# Altium PCB TopSheet.PcbDoc
Units mil, origin at the board's own origin, x right, y up, seen from the top; angles counter-clockwise.
Board outline 2204.72 x 2578.74 mil, 2 copper layers (Top Layer, Bottom Layer), stack 61.7 mil thick; 25 components, 29 nets, 166 pads, 12 vias.
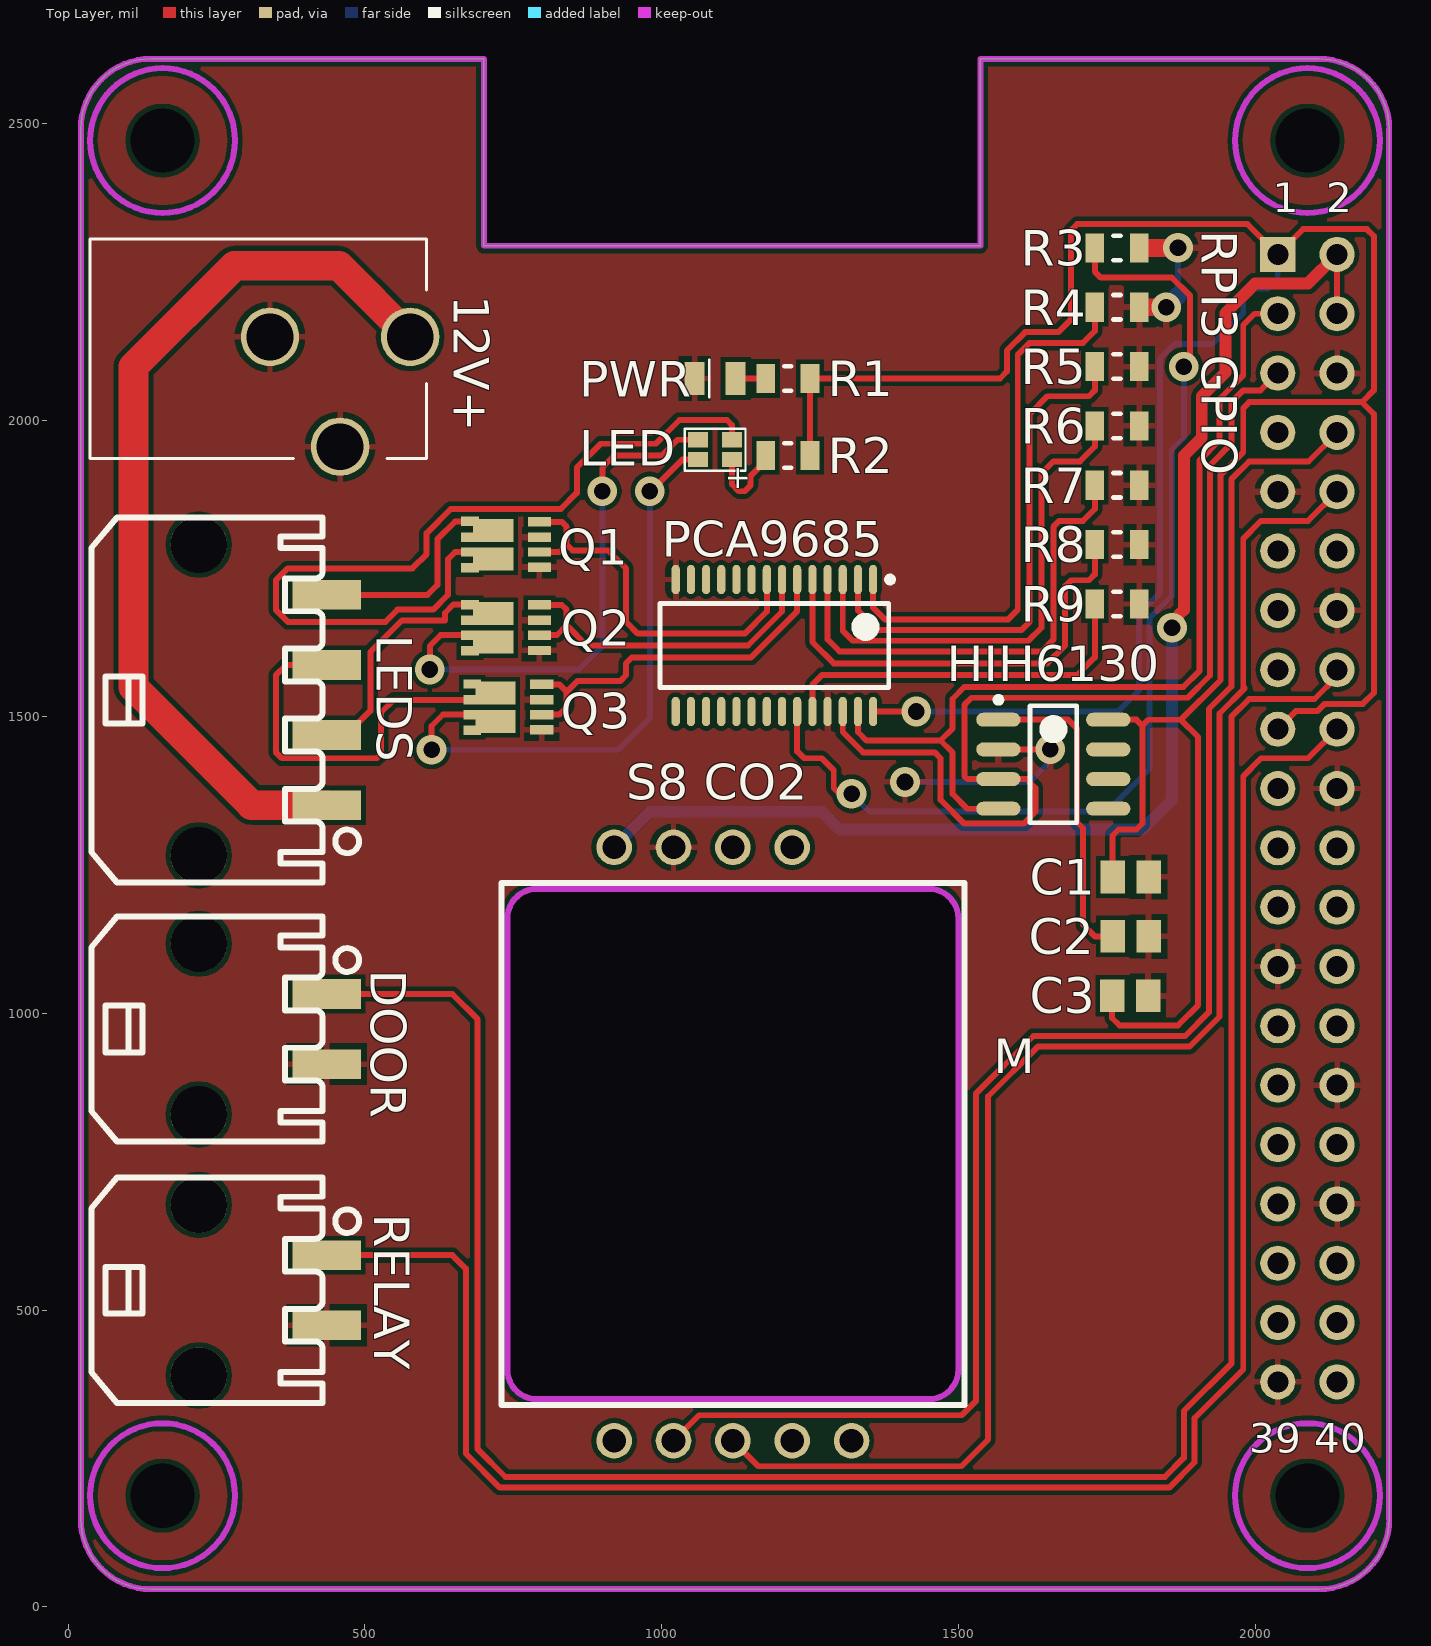
[diagram p0: Top Layer view]
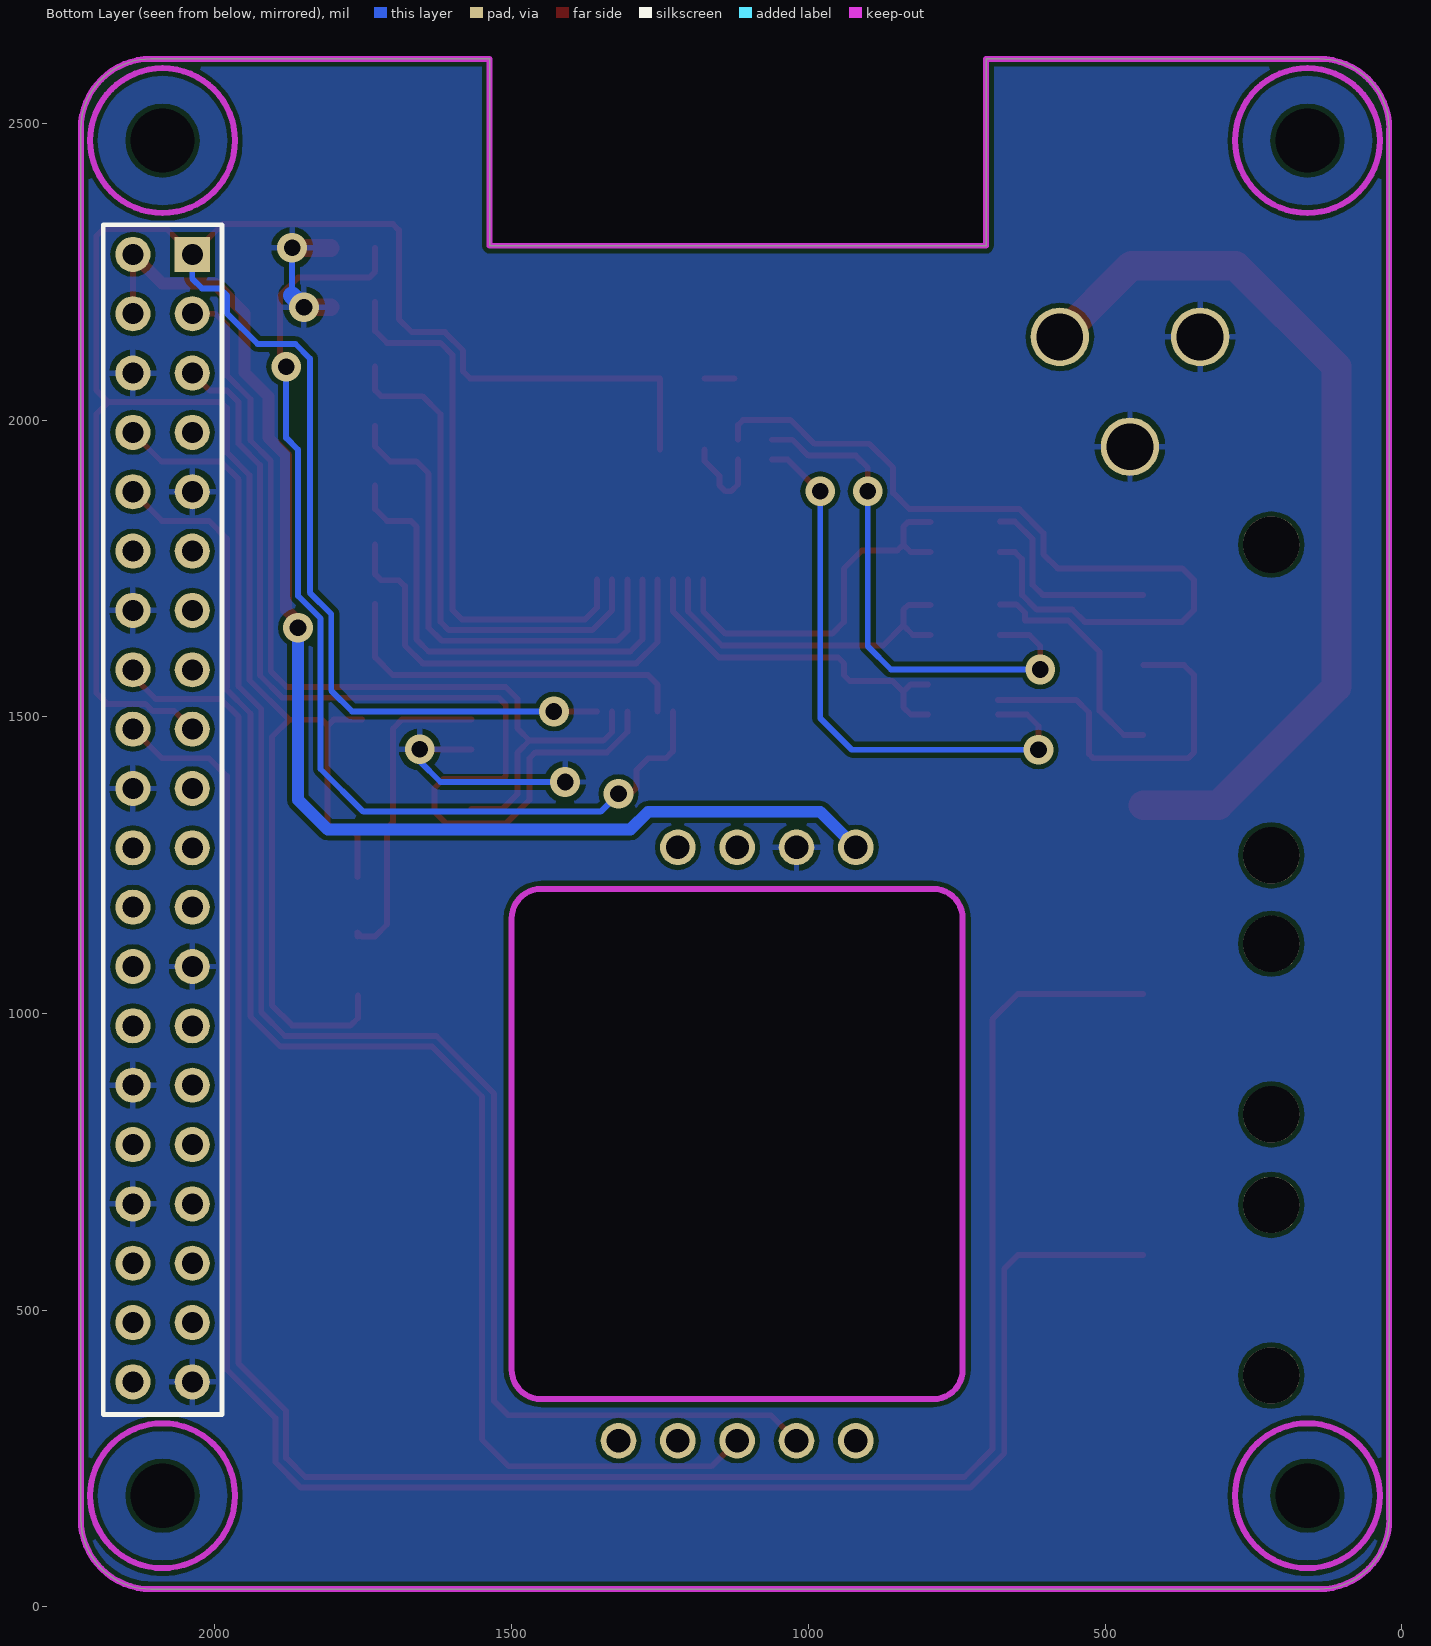
[diagram p1: Bottom Layer view, seen from below]

## Layer stack, top to bottom
Top Solder: solder mask 0.4, Solder Resist, Dk 3.5
Top Layer: signal copper 1.4
Dielectric 1: dielectric 58.9, FR-4, Dk 4.8
Bottom Layer: signal copper 1.4
Bottom Solder: solder mask 0.4, Solder Resist, Dk 3.5

## Board outline
21.26,147.99 21.26,2490.51 cw(c139.37,2490.51) 139.37,2608.62 700.39,2608.62 700.39,2293.66 1537.01,2293.66 1537.01,2608.62 2107.87,2608.62 cw(c2107.87,2490.51) 2225.98,2490.51 2225.98,147.99 cw(c2107.87,147.99) 2107.87,29.88 139.37,29.88 cw(c139.37,147.99)
cut-out: 740,400 740,1160 cw(c790,1160) 790,1210 1450,1210 cw(c1450,1160) 1500,1160 1500,400 cw(c1450,400) 1450,350 790,350 cw(c790,400)

## Design rules (kind name [scope] priority, off if disabled: settings)
AcuteAngle [All] p1: minimum=6.00000000000000E+0001 checktracksonly=FALSE
Clearance [All] p1: gap=8
DiffPairsRouting [All] p1: maxlimit=10 minlimit=5 mostfreqgap=10 toplayer_minwidth=5 toplayer_maxwidth=15 toplayer_prefwidth=10 bottomlayer_minwidth=5 bottomlayer_maxwidth=15 bottomlayer_prefwidth=10 maxuncoupledlength=500
HoleSize [All] p1: absolutevalues=TRUE maxlimit=247 minlimit=10 maxpercent=80.000 minpercent=20.000
MinimumAnnularRing [All] p1: minimumring=7
MinimumSolderMaskSliver [All] p1: minsoldermaskwidth=0
PolygonConnect [All] p1: connectstyle=Relief reliefconductorwidth=10 reliefentries=4 polygonreliefangle="90 Angle" airgapwidth=10
RoutingVias [All] p1: holewidth=15 width=31 viastyle="Through Hole" minholewidth=15 minwidth=28 maxholewidth=1000 maxwidth=1000
SMDEntry [All] p1: side=TRUE corner=TRUE anyangle=FALSE
SMDToCorner [All] p1: distance=100000
SolderMaskExpansion [All] p1: expansion=4
Width [All] p1: maxlimit=1000 minlimit=5 preferedwidth=10 minimp=50.000000 maximp=50.000000 favimp=50.000000
27 further rules are at their usual default settings.

## Components (designator, comment, footprint, x,y, rotation, side; value= is the part's Value field where it differs from the comment)
12V+ "CONN_BARREL_21X55_PJ-102A" CUI_21x55_BARREL 458.11,2140 r90 top
C1 "__template_cap" C0805 1790.51,1230 r0 top
C2 "__template_cap" C0805 1790.51,1130 r0 top
C3 "__template_cap" C0805 1789.49,1030 r0 top
DOOR "Molex - Micro-Fit 3.0 Series connector,  3.00mm (0.118\") pitch header, 2 positions." 43650-0209 220,973.7 r270 top
HIH6130 "HIH6130" 8SOIC150 1660,1420 r0 top
LED "LED_LTST-C19HE1WT" LED_LITEON_LTST-C19HE1WT 1090,1950 r90 top
LEDS "Molex - Micro-Fit 3.0 Series connector,  3.00mm (0.118\") pitch header, 4 positions." 43650-0409 220,1528.19 r270 top
PCA9685 "PWM_PCA9685" 28TSSOP65 1190,1620 r270 top
PWR "LED_LY971" 0805_Diode 1100,2070 r0 top
Q1 "NFET_SI7232DN" POWERPAK_1212-8_DUAL 750,1790 r180 top
Q2 "NFET_SI7232DN" POWERPAK_1212-8_DUAL 750,1650 r180 top
Q3 "NFET_SI7232DN" POWERPAK_1212-8_DUAL 753.96,1516.08 r180 top
R1 "__template_resistor" R0805 1212.6,2070 r180 top
R2 "__template_resistor" R0805 1212.6,1940 r180 top
R3 "__template_resistor" R0805 1767.4,2290 r0 top
R4 "__template_resistor" R0805 1767.4,2190 r0 top
R5 "__template_resistor" R0805 1767.4,2090 r0 top
R6 "__template_resistor" R0805 1767.4,1990 r0 top
R7 "__template_resistor" R0805 1767.4,1890 r0 top
R8 "__template_resistor" R0805 1767.4,1790 r0 top
R9 "__template_resistor" R0805 1767.4,1690 r0 top
RELAY "Molex - Micro-Fit 3.0 Series connector,  3.00mm (0.118\") pitch header, 2 positions." 43650-0209 220,533.7 r270 top
"RPI3 GPIO" "RPI GPIO Connector" RPI 2088.19,1329.09 r90 top
"S8 CO2" "S8_CO2_SENSOR" "S8 CO2 SENSOR" 920,1280 r0 top

## Footprints (in the part's own frame and the unit in brackets; to place one, negate y for a bottom-side part, rotate by r counter-clockwise, add the part's x,y. Pads: shape width x height; smd on the part's side, far side on the other; paste and mask are expansions set on the pad)
8SOIC150 [mm] "SOIC, 8-Leads, Body 5.0x4.0mm (max), Pitch 1.27mm, IPC High Density"
  oval 1.9x0.6 smd: 1(-2.35,1.905) 2(-2.35,0.635) 3(-2.35,-0.635) 4(-2.35,-1.905) 5(2.35,-1.905) 6(2.35,-0.635) 7(2.35,0.635) 8(2.35,1.905)
  silkscreen extent -2.47,-2.5 1,2.88, body extent -3.01,-2.5 3.01,2.5, height 1.75
28TSSOP65 [mm] "TSOP, 28-Leads, Body 9.8x4.5mm (max), Pitch 0.65mm, IPC High Density"
  oval 1.25x0.35 smd: 1(-2.825,4.225) 2(-2.825,3.575) 3(-2.825,2.925) 4(-2.825,2.275) 5(-2.825,1.625) 6(-2.825,0.975) 7(-2.825,0.325) 8(-2.825,-0.325) 9(-2.825,-0.975) 10(-2.825,-1.625) 11(-2.825,-2.275) 12(-2.825,-2.925) 13(-2.825,-3.575) 14(-2.825,-4.225) 15(2.825,-4.225) 16(2.825,-3.575) 17(2.825,-2.925) 18(2.825,-2.275) 19(2.825,-1.625) 20(2.825,-0.975) 21(2.825,-0.325) 22(2.825,0.325) 23(2.825,0.975) 24(2.825,1.625) 25(2.825,2.275) 26(2.825,2.925) 27(2.825,3.575) 28(2.825,4.225)
  silkscreen extent -2.95,-4.9 1.8,5.08, body extent -2.25,-4.9 2.25,4.9, height 1.2
0805_Diode [mm]
  rect 0.85x1.4 smd: 1(-1.129,0) 2(0.621,0)
  silkscreen extent -0.5,-0.8 -0.5,0.8, body extent -1.25,-0.62 0.75,0.63, height 0.59
43650-0209 [mm]
  round 2.41 hole 2.41: 1(-3.65,0) 1(3.65,0)
  rect 1.27x2.92 smd: P$1(1.5,5.48) P$2(-1.5,5.48)
  silkscreen extent -4.82,-4.6 4.82,5.3
43650-0409 [mm]
  round 2.41 hole 2.41: 1(-6.65,0) 1(6.65,0)
  rect 1.27x2.92 smd: P$1(4.5,5.48) P$2(1.5,5.48) P$3(-1.5,5.48) P$4(-4.5,5.48)
  silkscreen extent -7.82,-4.6 7.82,5.3
C0805 [mm] "Chip Capacitor, 2-Leads, Body 2.0x1.3mm, IPC High Density"
  rect 1.05x1.4 smd: 1(-0.775,0) 2(0.775,0)
  body extent -1,-0.62 1,0.63, height 0.6
CUI_21x55_BARREL [mm]
  round 2.5 hole 2: 1(0,-3) 2(0,3) 3(-4.7,0)
  silkscreen extent -5.2,-3.7 4.2,10.7, body extent -5.2,-3.7 4.2,10.7, height 11.5
LED_LITEON_LTST-C19HE1WT [mm] "LED RGB DIFFUSED 0606 SMD"
  rect 0.65x0.85 smd paste-0.05 mask+0.05: 1(-0.425,0.725) 2(0.425,0.725) 3(0.425,-0.725) 4(-0.425,-0.725)
  silkscreen extent -0.9,-1.3 0.9,1.3, body extent -0.8,-0.8 0.8,0.8, height 0.35
POWERPAK_1212-8_DUAL [mm] "PowerPAK 1212-8 Dual (Vishay footprint)"
  rect 0.99x0.405 smd: 1(-1.12,0.975) 2(-1.12,0.315) 3(-1.12,-0.315) 4(-1.12,-0.975)
  rect 1.725x0.99 smd: 5(0.863,-0.607) 7(0.863,0.607)
  rect 0.76x0.405 smd: 5(1.855,-0.992) 5(1.855,-0.315) 7(1.855,0.315) 7(1.855,0.992)
  body extent -1.5,-1.25 2,1.25, height 1.05
R0805 [mm] "Chip Resistor, 2-Leads, Body 2.0x1.3mm, IPC High Density"
  rect 0.8x1.25 smd: 1(-0.95,0) 2(0.95,0)
  silkscreen extent -0.15,-0.53 0.15,0.53, body extent -1,-0.62 1,0.63, height 0.6
RPI [mm]
  rect 1.5x1.5 hole 0.9: 1(24.13,1.27)
  round 1.5 hole 0.9: 2(24.13,-1.27) 3(21.59,1.27) 4(21.59,-1.27) 5(19.05,1.27) 6(19.05,-1.27) 7(16.51,1.27) 8(16.51,-1.27) 9(13.97,1.27) 10(13.97,-1.27) 11(11.43,1.27) 12(11.43,-1.27) 13(8.89,1.27) 14(8.89,-1.27) 15(6.35,1.27) 16(6.35,-1.27) 17(3.81,1.27) 18(3.81,-1.27) 19(1.27,1.27) 20(1.27,-1.27) 21(-1.27,1.27) 22(-1.27,-1.27) 23(-3.81,1.27) 24(-3.81,-1.27) 25(-6.35,1.27) 26(-6.35,-1.27) 27(-8.89,1.27) 28(-8.89,-1.27) 29(-11.43,1.27) 30(-11.43,-1.27) 31(-13.97,1.27) 32(-13.97,-1.27) 33(-16.51,1.27) 34(-16.51,-1.27) 35(-19.05,1.27) 36(-19.05,-1.27) 37(-21.59,1.27) 38(-21.59,-1.27) 39(-24.13,1.27) 40(-24.13,-1.27)
  body extent -25.52,-2.63 25.53,2.38, height 8.5
"S8 CO2 SENSOR" [mil]
  round 60 hole 40: 1(0,0) 2(100,0) 3(200,0) 4(300,0) 5(0,-1000) 6(100,-1000) 7(200,-1000) 8(300,-1000) 9(400,-1000)
  silkscreen extent -190,-940 590,-60, body extent -190,-940 590,-60, height 236

## Part data
12V+: "CONN JACK POWER 2.1MM PCB"
C1: library part "CAP CER 0.22UF 16V 10% X7R 0805"
C2: library part "CAP CER 0.1UF 50V 20% X7R 0805"
C3: library part "CAP CER 10UF 6.3V 10% X5R 0805"
DOOR RELAY: library part HEADER_POS2_?43650-0209
HIH6130: "Humidity Temperature Sensor 0 ~ 100% RH I²C ±4% RH 6s Surface Mount"
LED: "LED RGB DIFFUSED 0606"
LEDS: library part HEADER_POS4_?43650-0409
PWR: "LED 0805 GREEN 20MA"
Q1 Q2 Q3: "MOSFET 2N-CH 20V 25A PPAK 1212-8"
R1 R2: library part "RES 220 OHM 1/8W 1% 0805 SMD"
R3 R4 R5 R6 R7 R8 R9: library part "RES 10.0K OHM 1/8W 1% 0805 SMD"
"RPI3 GPIO": library part "rpi connector", "GPIO Header for Raspberry Pi A+/B+/Pi 2/Pi 3 - 2x20"

## Free pads (board coordinates)
  round 0 hole 108.27 unplated: ""(159.06,187.36) ""(159.06,2470.83) ""(2088.19,187.36) ""(2088.19,2470.83)

## Via types
v1: diameter 50, hole 28, Top Layer to Bottom Layer, 12 vias

## Nets (pads, with @x,y where several pads share a name; then routed paths per layer and width w, separated by ;. In a path a pad name is that pad's centre, name@x,y a point inside that pad or via, vN(x,y) a via of type N, cw(c..) or ccw(c..) an arc to the next point about the centre after c; other vN are vias at no path point)
+3V3: "RPI3 GPIO.1" "RPI3 GPIO.17" C1.1 C3.1 HIH6130.8 PCA9685.28 R1.1 R2.1 | length 5566.9
  Top Layer w10: R2.1@1250,1950 R1.1 1570,2070 1582,2082 1582,2117.46 1612.54,2148 1668,2148 1690,2170 1690,2320 1700,2330 1987.28,2330 2038.19,2279.09 2080.72,2321.62 2188.38,2321.62 2200,2310 2200,2050 2180,2030 ; PCA9685.28 v1(1428.78,1508.78) ; HIH6130.8 1799.92,1495 ; C3.1 1758.98,992.44 1771.42,980 1870,980 1904,1014 1904,1465.76 1874.88,1494.88 ; C1.1 1760,1300 1770,1310 1800,1310 1810,1320 1810,1484.88 ; 1799.92,1494.96 1810,1484.88 ; 2038.19,1479.09 2069.09,1510 2105.46,1510 2117.08,1521.62 2181.62,1521.62 2200,1540 2200,2010 2180,2030 ; 1810,1484.88 1820,1494.88 1874.88,1494.88 ; 1874.88,1494.88 1942,1562 1942,1907.46 1980,1945.46 1980,2020 1990,2030 2180,2030
  Bottom Layer w10: v1(1428.78,1508.78) 1768.78,1508.78 1804,1544 1804,1673.2 1840,1709.2 1840,2103.74 1864.26,2128 1928,2128 1980,2180 1980,2210 1991.62,2221.62 2021.62,2221.62 2038.19,2238.19 2038.19,2279.09 2038.19,2301.81
+5V: "RPI3 GPIO.2" "RPI3 GPIO.4" "S8 CO2.1" | length 2184.5
  Top Layer w10: v1(1860,1650) v1@1860,1660 ; 2138.19,2179.09 2138.19,2279.09
  Top Layer w20: v1@1860,1660 1880,1680 1880,1940 1910,1970 1910,2040 1950,2080 1950,2180 2000,2230 2089.09,2230 2138.19,2279.09
  Bottom Layer w20: 920,1280 980,1340 1270,1340 1300,1310 1810,1310 1860,1360 v1(1860,1650)
+12V: 12V+.1 LEDS.P$1 | length 1534.5
  Top Layer w50: LEDS.P$1 308.98,1351.02 110,1550 110,2090 280,2260 456.22,2260 12V+.1
BLUE_LED: LEDS.P$4 Q1.5 | length 337.6
  Top Layer w10: LEDS.P$4 605.36,1705.36 622,1722 622,1799.05 652.01,1829.06 Q1.5@676.97,1829.06
BLUE_PWM: PCA9685.8 Q1.2 Q1.4 | length 651.9
  Top Layer w10: Q1.2 827.6,1777.6 840,1790 ; Q1.4 831.61,1828.39 840,1820 840,1790 ; PCA9685.8 1177.2,1677.2 1140,1640 960,1640 940,1660 940,1750 910,1780 850,1780 840,1790
GND: 12V+.2 12V+.3 "RPI3 GPIO.6" "RPI3 GPIO.9" "RPI3 GPIO.14" "RPI3 GPIO.20" "RPI3 GPIO.25" "RPI3 GPIO.30" "RPI3 GPIO.34" "RPI3 GPIO.39" "S8 CO2.2" C1.2 C2.2 C3.2 DOOR.P$1 HIH6130.2 PCA9685.14 PCA9685.25 PWR.1 Q1.1 Q1.3 Q2.1 Q2.3 Q3.1 Q3.3 R3.2 R4.2 R5.2 R6.2 R7.2 R8.2 R9.2 RELAY.P$1 | length 585.7
  Top Layer w10: HIH6130.2 v1(1655,1445)
  Top Layer w30: R4.2 v1(1850,2190) ; R3.2 v1(1870,2290)
  Bottom Layer w10: v1(1410,1390) 1620,1390 1655,1425 v1(1655,1445) ; 1870,2210 v1(1870,2290)
  Bottom Layer w30: v1(1850,2190) 1870,2210
GPIO23: "RPI3 GPIO.16" DOOR.P$2 | length 3718.1
  Top Layer w10: DOOR.P$2 647.24,1032.76 690,990 690,265.9 736.9,219 1847.8,219 1880,251.2 1880,330 1960,410 1960,1500 1990,1530 2100,1530 2138.19,1568.19 2138.19,1579.09
GPIO24: "RPI3 GPIO.18" RELAY.P$2 | length 3205.9
  Top Layer w10: RELAY.P$2 647.24,592.76 670,570 670,258.4 727.4,201 1855.26,201 1898,243.74 1898,318 1980,400 1980,1400 2010,1430 2089.09,1430 2138.19,1479.09
GREEN_LED: LEDS.P$2 Q2.5 | length 397.6
  Top Layer w10: LEDS.P$2 468.23,1469.13 509.13,1510.03 509.13,1609.13 562.4,1662.4 634.8,1662.4 634.8,1674.8 649.06,1689.06 Q2.5@676.97,1689.06
GREEN_PWM: PCA9685.7 Q2.2 Q2.4 | length 582.6
  Top Layer w10: Q2.2 823.58,1637.6 840,1654.02 ; Q2.4 831.61,1688.39 840,1680 840,1654.02 ; PCA9685.7 1202.8,1677.34 1145.46,1620 874.02,1620 840,1654.02
NetC2_1: C2.1 HIH6130.1 | length 540.9
  Top Layer w10: HIH6130.1 1685,1495 1700,1480 1700,1322.12 1710,1312.12 1710,1150 1730,1130 1753.11,1130 1760,1136.89 C2.1
NetLED_1: LED.1 Q3.7 | length 992.4
  Top Layer w10: v1(612.3,1444.4) 612.3,1484.4 631.58,1503.68 Q3.7@680.93,1503.68 ; v1(980,1880) 981.46,1880 1034.72,1933.27 LED.1
  Bottom Layer w10: v1(612.3,1444.4) 927.1,1444.4 980,1497.3 v1(980,1880)
NetLED_2: LED.2 Q2.7 | length 904.2
  Top Layer w10: v1(609.3,1579.5) 609.3,1619.3 627.6,1637.6 Q2.7@676.97,1637.6 ; v1(900,1880) 900,1920 920,1940 1000,1940 1026.73,1966.73 LED.2
  Bottom Layer w10: v1(609.3,1579.5) 860.9,1579.5 900,1618.6 v1(900,1880)
NetLED_3: LED.3 Q1.7 | length 1423.7
  Top Layer w10: Q1.7@676.97,1777.6 652.01,1777.6 640,1765.59 640,1705.46 614.95,1680.4 554.95,1680.4 534.54,1660 370,1660 350,1680 350,1730 370,1750 580,1750 604,1774 604,1809.46 644.57,1850.03 830.03,1850.03 857.2,1877.2 857.2,1920 897.2,1960 990,1960 1030,2000 1110,2000 1118.54,1991.46 LED.3
NetLED_4: LED.4 R2.2 | length 152.6
  Top Layer w10: LED.4 1118.54,1891.46 1130,1880 1140,1880 1150,1890 1150,1905.94 1175.2,1931.14 R2.2 R2.2@1175.2,1950
NetPCA9685_1: PCA9685.1 R4.1 | length 931.4
  Top Layer w10: PCA9685.1 1356.34,1683.66 1376,1664 1584,1664 1600,1680 1600,2110 1620,2130 1710,2130 1730,2150 R4.1 R4.1@1730,2198.86
NetPCA9685_2: PCA9685.2 R5.1 | length 877.4
  Top Layer w10: PCA9685.2 1330.75,1679.25 1364,1646 1606,1646 1620,1660 1620,2010 1650,2040 1720,2040 1730,2050 R5.1
NetPCA9685_3: PCA9685.3 R6.1 | length 840.7
  Top Layer w10: PCA9685.3 1305.16,1644.84 1322,1628 1618,1628 1640,1650 1640,1910 1660,1930 1704.61,1930 1730,1955.39 R6.1
NetPCA9685_4: PCA9685.4 R7.1 | length 810.4
  Top Layer w10: PCA9685.4 1279.57,1630.43 1300,1610 1640,1610 1660,1630 1660,1820 1670,1830 1710,1830 1730,1850 R7.1
NetPCA9685_5: PCA9685.5 R8.1 | length 766.9
  Top Layer w10: PCA9685.5 1253.98,1626.02 1290,1590 1650,1590 1680,1620 1680,1720 1690,1730 1720,1730 1730,1740 R8.1
NetPCA9685_23: PCA9685.23 R3.1 | length 1793
  Top Layer w10: PCA9685.23 1228.39,1441.61 1240,1430 1270,1430 1290,1410 1290,1380 1300,1370 v1(1320,1370) ; R3.1 1730,2250 1740,2240 1860,2240 1890,2210 1890,2100 v1(1880,2090)
  Bottom Layer w10: v1(1320,1370) 1350,1340 1750,1340 1822,1412 1822,1665.74 1860,1703.74 1860,1950 1880,1970 v1(1880,2090)
NetPCA9685_24: PCA9685.24 R9.1 | length 630.3
  Top Layer w10: PCA9685.24 1253.98,1553.98 1270,1570 1700,1570 1730,1600 R9.1
NetPWR_2: PWR.2 R1.2 | length 50.7
  Top Layer w10: PWR.2 R1.2
RED_LED: LEDS.P$3 Q3.5 | length 639.8
  Top Layer w10: LEDS.P$3 367.25,1587.25 350,1570 350,1440 360,1430 520,1430 527.13,1437.13 527.13,1507.13 548.48,1528.48 Q3.5@680.93,1528.48
RED_PWM: PCA9685.6 Q3.2 Q3.4 | length 630
  Top Layer w10: Q3.2 827.54,1503.68 840,1516.14 840,1542.01 ; Q3.4 827.54,1554.47 840,1542.01 ; PCA9685.6 1228.39,1677.47 1150.91,1600 950,1600 940,1590 940,1570 930,1560 857.99,1560 840,1542.01
RX: "RPI3 GPIO.10" "S8 CO2.7" | length 2505.4
  Top Layer w10: 1120,280 1163,237 1505.2,237 1550,281.8 1550,860 1634,944 1889.46,944 1940,994.54 1940,1505.46 1982.54,1548 1980,1550.54 1980,1800 2010,1830 2089.09,1830 2138.19,1879.09
SCL: "RPI3 GPIO.5" HIH6130.3 PCA9685.26 | length 1770.7
  Top Layer w10: PCA9685.26 1305.16,1474.17 1339.33,1440 1460,1440 1470,1430 1470,1360 1510.12,1319.88 1609.88,1319.88 1630,1340 1630,1380 1615,1395 HIH6130.3 1515,1395 1510,1400 1510,1520 1522,1532 1886.54,1532 1924,1569.46 1924,1924 1960,1960 1960,2030 1980,2050 2009.09,2050 2038.19,2079.09 2037.28,2080
SDA: "RPI3 GPIO.3" HIH6130.4 PCA9685.27 | length 1559.4
  Top Layer w10: PCA9685.27 1330.75,1474.17 1344.92,1460 1470,1460 ; HIH6130.4 1515,1345 1490,1370 1490,1440 1470,1460 ; 2038.19,2179.09 1999.09,2179.09 1980,2160 1980,2075.46 1940,2035.46 1940,1965.46 1906,1931.46 1906,1576.91 1879.09,1550 1510,1550 1490,1530 1490,1480 1470,1460
TX: "RPI3 GPIO.8" "S8 CO2.6" | length 2629.8
  Top Layer w10: 1020,280 1063,323 1505.7,323 1530,347.3 1530,865.46 1626.54,962 1882,962 1922,1002 1922,1512.91 1960,1550.91 1960,1900 1990,1930 2090,1930 2138.19,1978.19 2138.19,1979.09
pads on no net: "RPI3 GPIO.7" "RPI3 GPIO.11" "RPI3 GPIO.12" "RPI3 GPIO.13" "RPI3 GPIO.15" "RPI3 GPIO.19" "RPI3 GPIO.21" "RPI3 GPIO.22" "RPI3 GPIO.23" "RPI3 GPIO.24" "RPI3 GPIO.26" "RPI3 GPIO.27" "RPI3 GPIO.28" "RPI3 GPIO.29" "RPI3 GPIO.31" "RPI3 GPIO.32" "RPI3 GPIO.33" "RPI3 GPIO.35" "RPI3 GPIO.36" "RPI3 GPIO.37" "RPI3 GPIO.38" "RPI3 GPIO.40" "S8 CO2.3" "S8 CO2.4" "S8 CO2.5" "S8 CO2.8" "S8 CO2.9" DOOR.1 HIH6130.5 HIH6130.6 HIH6130.7 LEDS.1 PCA9685.9 PCA9685.10 PCA9685.11 PCA9685.12 PCA9685.13 PCA9685.15 PCA9685.16 PCA9685.17 PCA9685.18 PCA9685.19 PCA9685.20 PCA9685.21 PCA9685.22 RELAY.1

## Polygon pours and split planes (outlines as drawn)
GND on Top Layer "GND" (solid, pour order 4): 139.37,2613.64 700.39,2613.64 cw(c700.39,2608.62) 705.41,2608.62 705.41,2298.68 1531.99,2298.68 1531.99,2608.62 cw(c1537.01,2608.62) 1537.01,2613.64 2107.87,2613.64 cw(c2107.87,2490.51) 2231,2490.51 2231,128.31 cw(c2225.98,128.31) 2228.65,124.06 cw(c2107.87,147.99) 2107.91,24.87 cw(c2107.87,29.88) 2107.87,24.87 139.37,24.87 cw(c139.37,29.88) 139.34,24.87 ccw(c139.35,147.86) 139.37,24.87 139.34,24.87 cw(c139.37,147.99) 18.59,124.06 cw(c21.26,128.31) 16.24,128.31 16.24,2490.51 cw(c139.37,2490.51)
GND on Bottom Layer "GND" (solid, pour order 5): 139.37,2613.64 700.39,2613.64 cw(c700.39,2608.62) 705.41,2608.62 705.41,2298.68 1531.99,2298.68 1531.99,2608.62 cw(c1537.01,2608.62) 1537.01,2613.64 2107.87,2613.64 cw(c2107.87,2490.51) 2231,2490.51 2231,128.31 cw(c2225.98,128.31) 2228.65,124.06 cw(c2107.87,147.99) 2107.91,24.87 cw(c2107.87,29.88) 2107.87,24.87 139.37,24.87 cw(c139.37,29.88) 139.34,24.87 ccw(c139.35,147.86) 139.37,24.87 139.34,24.87 cw(c139.37,147.99) 18.59,124.06 cw(c21.26,128.31) 16.24,128.31 16.24,2490.51 cw(c139.37,2490.51)

## Keep-outs
Keep-Out Layer:
  circle w10: c2088.19,2470.83 r122.05
  circle w10: c159.06,2470.83 r122.05
  circle w10: c2088.19,187.36 r122.05
  circle w10: c159.06,187.36 r122.05
  lines w10: 21.26,147.99 ccw(c139.37,147.99) 139.37,29.88 2107.87,29.88 ccw(c2107.87,147.99) 2225.98,147.99 2225.98,2490.51 ccw(c2107.87,2490.51) 2107.87,2608.62 1537.01,2608.62 1537.01,2293.66 700.39,2293.66 700.39,2608.62 139.37,2608.62 ccw(c139.37,2490.51) 21.26,2490.51 21.26,147.99 ; 740,400 ccw(c790,400) 790,350 1450,350 ccw(c1450,400) 1500,400 1500,1160 ccw(c1450,1160) 1450,1210 790,1210 ccw(c790,1160) 740,1160 740,400

## Silkscreen, mask and mechanical layers (free items; w line width, h text height)
Top Overlay:
  circle w10: c470,650 r20
  circle w10: c470,1090 r20
  circle w10: c470,1290 r20
  text "M" at 1560,880 h100
Top Solder:
  text "SMART HOME" at 740,2190 h150
  text "H" at 1006,97 h15
  text "Davy Ragland | 2017 | git.io/vMKVF /      Made with      in Stanford, CA" at 520,40 h100

## Text inside footprints (layer, text, board x,y; h text height)
LED: Top Overlay "+" at 1145.12,1879.13 h39.37 r90
"RPI3 GPIO": Top Overlay "40" at 2100,260 h50; Top Overlay "39" at 1990,260 h50; Top Overlay "1" at 2030,2350 h50; Top Overlay "2" at 2120,2350 h50